# Altium PCB Solar Power Stage-V1.00.PcbDoc
Units mil, origin at the board's own origin, x right, y up, seen from the top; angles counter-clockwise.
Board outline 6000 x 4000 mil, 2 copper layers (Top Layer, Bottom Layer), stack 61.756 mil thick; 163 components, 96 nets, 371 pads, 0 vias.
Unrouted connection lines stored in the file: 245.
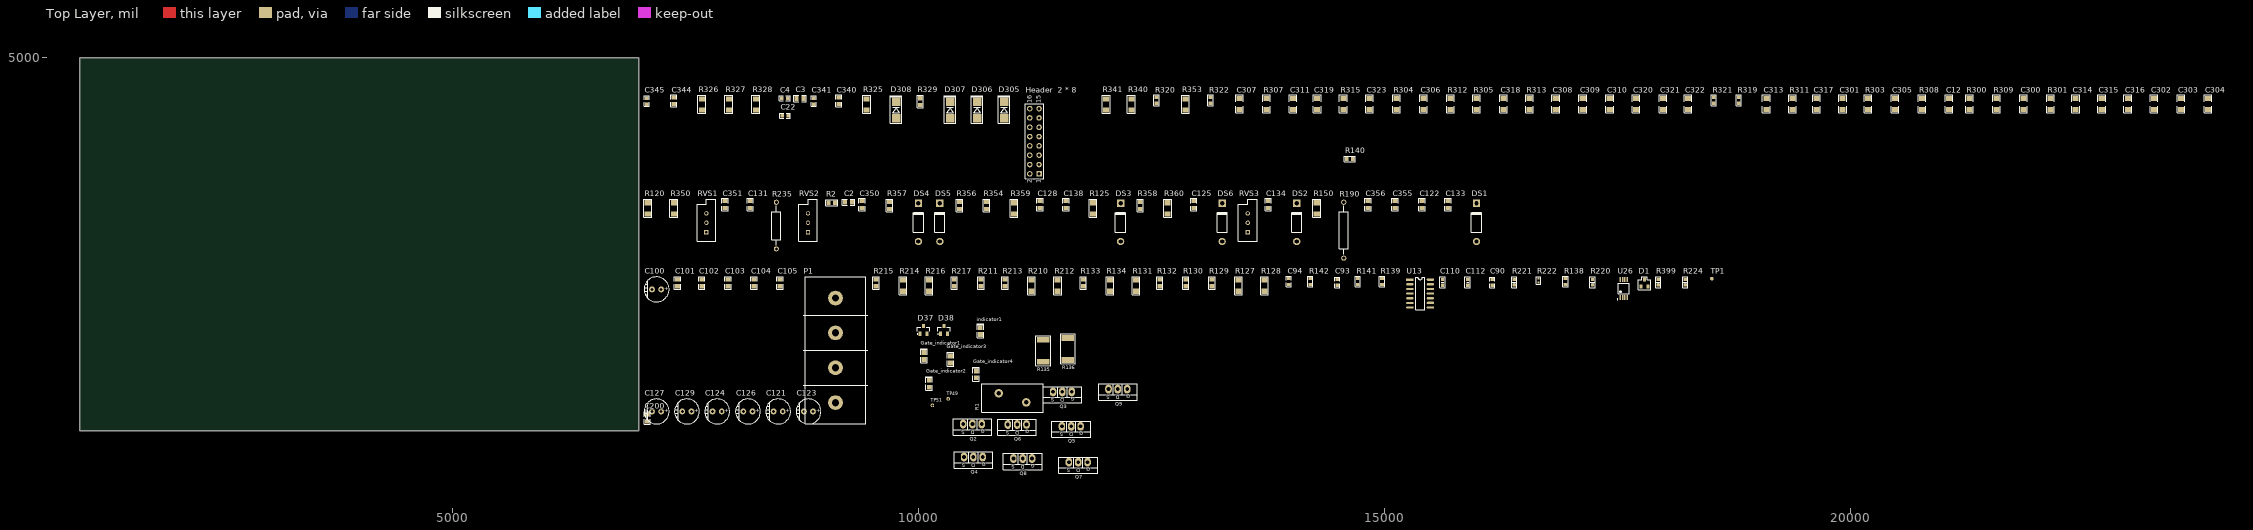
[diagram p0: Top Layer view]
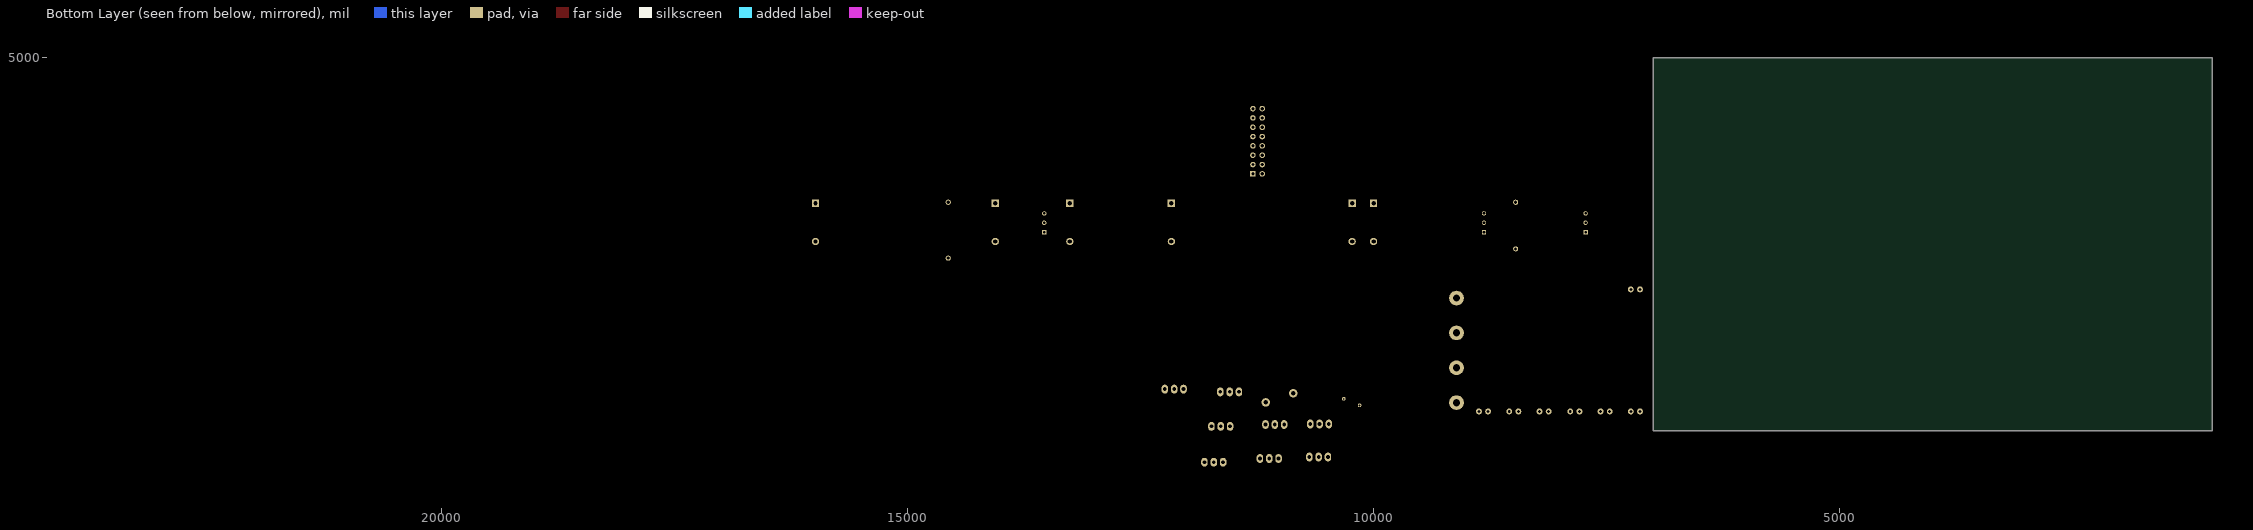
[diagram p1: Bottom Layer view, seen from below]

## Layer stack, top to bottom
Top Solder: solder mask 1, SM-001, Dk 4
Top Layer: signal copper 1.378
Dielectric 1: core 59, Core-043, Dk 4.3
Bottom Layer: signal copper 1.378
Bottom Solder: solder mask 1, SM-001, Dk 4

## Board outline
1000,1000 7000,1000 7000,5000 1000,5000

## Design rules (kind name [scope] priority, off if disabled: settings)
Clearance [All] p1: gap=10 ignorepadtopadclearanceinfootprint=FALSE except(0: Arc-Hole Track-Hole SMDPad-Hole THPad-Hole Via-Hole Fill-Hole Poly-Hole Region-Hole Text-Hole)
PolygonConnect [All] p1: connectstyle=Relief reliefconductorwidth=10 reliefentries=4 polygonreliefangle="90 Angle" airgapwidth=10
RoutingVias [All] p1: holewidth=28 width=50 viastyle="Through Hole" minholewidth=28 minwidth=50 maxholewidth=28 maxwidth=50
SolderMaskExpansion [All] p1: expansion=4 istentingtop=FALSE
Width [All] p1: maxlimit=10 minlimit=10 preferedwidth=10
30 further rules are at their usual default settings.

## Classes and differential pairs
component class MainBoard_Motor3: C3 C4 C12 C300 C301 C302 C303 C304 C305 C306 C307 C308 C309 C310 C311 C313 C314 C315 C316 C317 C318 C319 C320 C321 C322 C323 C325 C326 C327 C328 C329 C330 C331 C340 C341 C342 C344 C345 D305 D306 D307 D308 Gate_indicator1 Gate_indicator2 Gate_indicator3 Gate_indicator4 HCPL1 HCPL2 HCPL3 HCPL4 "Header  2 * 8" R300 R301 R303 R304 R305 R307 R308 R309 R311 R312 R313 R315 R319 R320 R321 R322 R325 R326 R327 R328 R329 R340 R341 R353 Z300 Z301 Z303 Z304
component class MainBoard_Motor2: C1 C2 C121 C122 C123 C124 C125 C126 C127 C128 C129 C131 C133 C134 C138 C200 C350 C351 C355 C356 Cf130 Cf132 DS1 DS2 DS3 DS4 DS5 DS6 indicator1 mosfet1 R2 R120 R125 R150 R190 R235 R350 R354 R356 R357 R358 R359 R360 Reg1_12v Reg2_12v Reg3_12v RVS1 RVS2 RVS3 T1 U1 Z1
component class MainBoard_Motor1: C22 C90 C93 C94 C100 C101 C102 C103 C104 C105 C110 C112 D1 D37 D38 P1 Q2 Q3 Q4 Q5 Q6 Q7 Q8 Q9 R1 R127 R128 R129 R130 R131 R132 R133 R134 R135 R136 R138 R139 R140 R141 R142 R210 R211 R212 R213 R214 R215 R216 R217 R220 R221 R222 R224 R399 TP1 TP49 TP51 U13 U26

## Components (designator, comment, footprint, x,y, rotation, side; value= is the part's Value field where it differs from the comment)
C2 "2.2nF" C0805 9250,3450 r0 top
C3 "4.7uF" C0805 8730,4565 r0 top
C4 "100nF" C0603 8565,4565 r0 top
C12 "0.1uF" 1206 21060,4505 r90 top
C22 "100nF" C0603 8570,4380 r0 top
C90 "10pF" C0603 16160,2590 r90 top
C93 "470pF" C0603 14495,2590 r90 top
C94 "10pF" C0603 13975,2600 r90 top
C100 "47uF 50V" RB-SGF-6.3MM 7190,2515 r0 top
C101 "100nF" C0805 7415,2585 r90 top
C102 "100nF" C0805 7675,2585 r90 top
C103 "100nF" C0805 7955,2585 r90 top
C104 "1uF" C0805 8235,2585 r90 top
C105 "1uF" C0805 8515,2585 r90 top
C110 "10nF" 0603-C-PW 15625,2590 r90 top value="MKP63 472M 300~Y2-4.7nF"
C112 "1000pF" 0603-C-PW 15895,2590 r90 top value="MKP63 472M 300~Y2-4.7nF"
C121 "100uF 25V" CAP_E_6.3x9_2.5 8495,1205 r0 top
C122 "100nF" C0805 15405,3425 r90 top
C123 "100uF 25V" CAP_E_6.3x9_2.5 8820,1205 r0 top
C124 "100uF 25V" CAP_E_6.3x9_2.5 7840,1205 r0 top
C125 "100nF" C0805 12955,3425 r90 top
C126 "100uF 25V" CAP_E_6.3x9_2.5 8170,1205 r0 top
C127 "100uF 25V" CAP_E_6.3x9_2.5 7190,1205 r0 top
C128 "100nF" C0805 11305,3425 r90 top
C129 "100uF 25V" CAP_E_6.3x9_2.5 7515,1205 r0 top
C131 "100nF" C0805 8195,3425 r90 top
C133 "100nF" C0805 15685,3425 r90 top
C134 "100nF" C0805 13755,3425 r90 top
C138 "100nF" C0805 11585,3425 r90 top
C200 "100pF" C0805 7090,1135 r90 top
C300 "0.1uF" 1206 21860,4505 r90 top
C301 "330pF" 1206 19920,4505 r90 top
C302 "0.1uF" 1206 23260,4505 r90 top
C303 "0.1uF" 1206 23550,4505 r90 top
C304 "100pF" 1206 23840,4505 r90 top
C305 "0.1uF" 1206 20480,4505 r90 top
C306 "0.1uF" 1206 15420,4505 r90 top
C307 "330pF" 1206 13445,4505 r90 top
C308 "0.1uF" 1206 16840,4505 r90 top
C309 "0.1uF" 1206 17130,4505 r90 top
C310 "100pF" 1206 17420,4505 r90 top
C311 "0.1uF" 1206 14020,4505 r90 top
C313 "330pF" 1206 19100,4505 r90 top
C314 "0.1uF" 1206 22420,4505 r90 top
C315 "0.1uF" 1206 22700,4505 r90 top
C316 "100pF" 1206 22980,4505 r90 top
C317 "0.1uF" 1206 19640,4505 r90 top
C318 "0.1uF" 1206 16280,4505 r90 top
C319 "330pF" 1206 14280,4505 r90 top
C320 "0.1uF" 1206 17700,4505 r90 top
C321 "0.1uF" 1206 17990,4505 r90 top
C322 "100pF" 1206 18260,4505 r90 top
C323 "0.1uF" 1206 14840,4505 r90 top
C340 "4.7uF" C0805 9145,4540 r90 top
C341 "100nF" C0603 8875,4535 r90 top
C344 "4.7uF" C0805 7375,4540 r90 top
C345 "100nF" C0603 7085,4535 r90 top
C350 "10nF" C0805 9395,3425 r90 top
C351 "470pF" C0805 7925,3425 r90 top
C355 "470nF" C0805 15115,3425 r90 top
C356 "10nF" C0805 14825,3425 r90 top
D1 "BAV99" SOT-23-PW 17755,2545 r0 top
D37 "BAV99" SOT-23 10055,2080 r0 top
D38 "BAV99" SOT-23 10275,2080 r0 top
D305 "5.1V" DO-214AC-PW 10920,4440 r90 top
D306 "5.1V" DO-214AC-PW 10630,4440 r90 top
D307 "5.1V" DO-214AC-PW 10340,4440 r90 top
D308 "5.1V" DO-214AC-PW 9760,4440 r90 top
DS1 "BYV27-100." DO-41 15990,3235 r90 top
DS2 "BYV27-100" DO-41 14060,3235 r90 top
DS3 "BYV27-100" DO-41 12170,3235 r90 top
DS4 "BYV27-100" DO-41 10000,3235 r90 top
DS5 "BYV27-100" DO-41 10230,3235 r90 top
DS6 "BYV27-100" DO-41 13260,3235 r90 top
Gate_indicator1 "GREEN" LED_0805_GREEN 10060,1800 r90 top
Gate_indicator2 "GREEN" LED_0805_GREEN 10115,1502 r90 top
Gate_indicator3 "GREEN" LED_0805_GREEN 10345,1762 r90 top
Gate_indicator4 "GREEN" LED_0805_GREEN 10620,1602 r90 top
"Header  2 * 8" "FROM DSP_ HEADER7X" HDR2X8 11295,3755 r90 top
indicator1 "GREEN" LED_0805_GREEN 10665,2067 r90 top
P1 "TERMINAL4_9.5mm" "Terminal 9.5mm_4" 9110,1300 r90 top
Q2 "IRF3205" TO-220 10580,1070 r180 top
Q3 "IRF3205" TO-220 11545,1415 r180 top
Q4 "IRF3205" TO-220 10589.85,715.82 r180 top
Q5 "IRF3205" TO-220 11640,1045 r180 top
Q6 "IRF3205" TO-220 11060,1065 r180 top
Q7 "IRF3205" TO-220 11715,660 r180 top
Q8 "IRF3205" TO-220 11120,700 r180 top
Q9 "IRF3205" TO-220 12140,1445 r180 top
R1 "VARISTOR" VARISTOR 11009.69,1351.06 r90 top
R2 "2.2k" R0805 9070,3445 r0 top
R120 "1R" R1206 7095,3385 r90 top
R125 "20R" R1206 11875,3385 r90 top
R127 "20R" R1206 13435,2555 r90 top
R128 "20R" R1206 13715,2555 r90 top
R129 "4.7K" R0805 13150,2585 r90 top
R130 "4.7K" R0805 12870,2585 r90 top
R131 "20R" R1206 12335,2555 r90 top
R132 "4.7K" R0805 12590,2585 r90 top
R133 "4.7K" R0805 11770,2585 r90 top
R134 "20R" R1206 12055,2555 r90 top
R135 "0.05" 2512 11339.13,1856.81 r90 top
R136 "0.05" 2512 11604.13,1876.81 r90 top
R138 "86.6K" R0603 16945,2600 r90 top
R139 "3K" R0603 14975,2600 r90 top
R140 "1K" R0603 14630,3915 r0 top
R141 "3K" R0603 14715,2600 r90 top
R142 "86.6K" R0603 14205,2600 r90 top
R150 "10k" R1206 14275,3385 r90 top
R190 "25k" AXIAL-0.6 14565,3150 r90 top
R210 "20R" R1206 11215,2555 r90 top
R211 "4.7K" R0805 10670,2585 r90 top
R212 "20R" R1206 11495,2555 r90 top
R213 "4.7K" R0805 10930,2585 r90 top
R214 "20R" R1206 9835,2555 r90 top
R215 "4.7K" R0805 9545,2585 r90 top
R216 "20R" R1206 10115,2555 r90 top
R217 "4.7K" R0805 10385,2585 r90 top
R220 "10k" 0603-R-PW 17235,2590 r90 top
R221 "10K" 0603-R-PW 16395,2590 r90 top
R222 "10K" 0402-R-PW 16655,2590 r90 top
R224 "390K" 0603-R-PW 18230,2590 r90 top
R235 "680" AXIAL-0.5 8475,3200 r90 top
R300 "3.3K" 1206 21280,4505 r90 top
R301 "100" 1206 22150,4505 r90 top
R303 "47k" 1206 20190,4505 r90 top
R304 "3.3K" 1206 15130,4505 r90 top
R305 "100" 1206 15990,4505 r90 top
R307 "47k" 1206 13735,4505 r90 top
R308 "3.3K" 1206 20770,4505 r90 top
R309 "100" 1206 21570,4505 r90 top
R311 "47k" 1206 19380,4505 r90 top
R312 "3.3K" 1206 15710,4505 r90 top
R313 "100" 1206 16560,4505 r90 top
R315 "47k" 1206 14560,4505 r90 top
R319 "5K" R0603 18805,4545 r90 top
R320 "5K" R0603 12555,4545 r90 top
R321 "5K" R0603 18535,4545 r90 top
R322 "5K" R0603 13135,4545 r90 top
R325 "470R" R1206 9445,4500 r90 top
R326 "470R" R1206 7675,4500 r90 top
R327 "470R" R1206 7965,4500 r90 top
R328 "470R" R1206 8255,4500 r90 top
R329 "50R" R0805 10020,4530 r90 top
R340 "50R" R1206 12285,4500 r90 top
R341 "50R" R1206 12015,4500 r90 top
R350 "1R" R1206 7375,3385 r90 top
R353 "50R" R1206 12865,4500 r90 top
R354 "22K" R0805 10730,3415 r90 top
R356 "3.3k" R0805 10440,3415 r90 top
R357 "1k" R0805 9690,3415 r90 top
R358 "0 ohm" R0805 12380,3415 r90 top
R359 "150k" R1206 11025,3385 r90 top
R360 "33k" R1206 12675,3385 r90 top
R399 "10K" 0603-R-PW 17940,2590 r90 top
RVS1 "50K" VR5 7725,3230 r90 top
RVS2 "10K" VR5 8815,3230 r90 top
RVS3 "120K" VR5 13535,3230 r90 top
TP1 "TP" TP-SMD-1MM 18515,2630 r90 top
TP49 "TP" TP_1mm 10320,1340 r90 top
TP51 "TP" TP_1mm 10150,1270 r90 top
U13 "LMV324DTBR2G" SO-14 15385,2470 r0 top
U26 "LM2903DGKR" TSSOP_8-PW 17570,2525 r90 top

## Footprints (in the part's own frame and the unit in brackets; to place one, negate y for a bottom-side part, rotate by r counter-clockwise, add the part's x,y. Pads: shape width x height; smd on the part's side, far side on the other; paste and mask are expansions set on the pad)
0402-R-PW [mil] "C0402"
  rect 20x24 smd: 1(0,0) 2(40,0)
  silkscreen extent -19,-22 59,22
0603-C-PW [mm]
  rect 0.9x0.9 smd: 1(-0.78,0) 2(0.78,0)
  silkscreen extent -1.53,-0.75 1.53,0.75, body extent -0.75,-0.41 0.85,0.4, height 0.9
0603-R-PW [mm]
  rect 0.8x0.9 smd: 1(-0.749,0) 2(0.749,0)
  silkscreen extent -1.48,-0.72 1.48,0.72, body extent -0.75,-0.41 0.85,0.4, height 0.37
1206 [mm] "1206"
  rect 1.4x1.65 smd: 1(-1.524,0) 2(1.524,0)
  Top Layer pour cut-out: 0.635,1.016 0.635,-1.143 -0.635,-1.144 -0.635,1.016
  silkscreen extent -2.45,-1.05 2.45,1.05, body extent -1.55,-0.78 1.55,0.78, height 0.47
2512 [mm] "Molded Resistor, 2-Leads, Body 6.4x3.2mm, IPC Medium Density"
  rect 1.6x3.4 smd mask+0.15: 1(-3,0) 2(3,0)
  silkscreen extent -4.1,-2 4.1,2, body extent -3.3,-1.7 3.3,1.7, height 0.7
AXIAL-0.5 [mm] "Axial Device, Thru-Hole; 2 Leads; 0.5 in Pin Spacing"
  round 1.4 hole 0.85: 1(-6.35,0) 2(6.35,0)
  silkscreen extent -5.33,-1.27 5.33,1.27
AXIAL-0.6 [mm] "Axial Device, Thru-Hole; 2 Leads; 0.6 in Pin Spacing"
  round 1.4 hole 0.85: 1(-7.62,0) 2(7.62,0)
  silkscreen extent -6.6,-1.27 6.6,1.27
C0603 [mm] "0603"
  rect 0.9x1 smd: 1(-0.8,0) 2(0.8,0)
  silkscreen extent -1.45,-0.7 1.45,0.7, body extent -0.8,-0.4 0.8,0.4, height 0.3
C0805 [mm] "0805"
  rect 1.1x1.32 smd: 1(-0.925,0) 2(0.925,0)
  silkscreen extent -1.68,-0.86 1.68,0.86, body extent -1,-0.62 1,0.63, height 0.78
CAP_E_6.3x9_2.5 [mm]
  round 1.6 hole 0.8: 1(1.25,0) 2(-1.25,0)
  silkscreen extent -3.4,-3.4 3.4,3.4, body extent -3.16,-3.15 3.15,3.15, height 9.01
DO-41 [mm] "Diode, Axial; Body 5.2 x 2.7 mm (LxDia. max), Lead Dia. 0.86 mm (max)"
  round 2 hole 1.2: 1(-5.23,0)
  rect 2x2 hole 1.2: 2(5.23,0)
  silkscreen extent -2.65,-1.4 2.75,1.4
DO-214AC-PW [mm]
  rect 2.3x2.3 smd: 1(-2.2,0) 2(2.2,0)
  silkscreen extent -3.65,-1.55 3.95,1.55, body extent -2.6,-1.3 2.6,1.3, height 2.4
HDR2X8 [mm] "Connector; Header; 8x2 Position"
  rect 1.5x1.5 hole 0.9: 1(0,0)
  round 1.5 hole 0.9: 2(0,2.54) 3(2.54,0) 4(2.54,2.54) 5(5.08,0) 6(5.08,2.54) 7(7.62,0) 8(7.62,2.54) 9(10.16,0) 10(10.16,2.54) 11(12.7,0) 12(12.7,2.54) 13(15.24,0) 14(15.24,2.54) 15(17.78,0) 16(17.78,2.54)
  silkscreen extent -1.27,-1.27 19.05,3.81
LED_0805_GREEN [mil] "Surface mount LED 0805"
  rect 50x51.18 smd: 1(-37,0)
  rect 50x50 smd: 2(37,0)
  silkscreen extent -71,-35 77,35, body extent -40,-25 40,25, height 43
R0603 [mm] "0603"
  rect 0.9x1 smd: 1(-0.8,0) 2(0.8,0)
  silkscreen extent -1.45,-0.7 1.45,0.7, body extent -0.8,-0.4 0.8,0.4, height 0.37
R0805 [mm] "0805"
  rect 1.1x1.32 smd: 1(-0.925,0) 2(0.925,0)
  silkscreen extent -1.68,-0.86 1.68,0.86, body extent -1,-0.63 1,0.63, height 0.47
R1206 [mm] "1206"
  rect 1.4x1.65 smd: 1(-1.524,0) 2(1.524,0)
  Top Layer pour cut-out: 0.635,1.016 0.635,-1.143 -0.635,-1.144 -0.635,1.016
  silkscreen extent -2.45,-1.05 2.45,1.05, body extent -1.55,-0.78 1.55,0.78, height 0.47
RB-SGF-6.3MM [mm]
  round 1.6 hole 0.8: 1(1.25,0) 2(-1.25,0)
  silkscreen extent -3.4,-3.4 3.4,3.4
SO-14 [mil] "SOIC-14"
  rect 80x25 smd: 1(-110,150)
  oval 80x25 smd: 2(-110,100) 3(-110,50) 4(-110,0) 7(-110,-150) 8(110,-150) 9(110,-100) 12(110,50) 13(110,100) 14(110,150)
  oval 80x24 smd: 5(-110,-50) 6(-110,-100) 10(110,-50) 11(110,0)
  silkscreen extent -50,-175 50,175, body extent -122,-172 122,172, height 69
SOT-23 [mil] "SOT-23"
  rect 32x50 smd: 1(-37.4,-42.5) 2(37.4,-42.5)
  rect 32x45 smd: 3(0,42.5)
  silkscreen extent -69,-45 66,29, body extent -59,-45 59,43, height 47
SOT-23-PW [mil] "SOT-23"
  rect 36x45 smd: 1(0,0) 2(74.8,0) 3(37.4,74.8)
  silkscreen extent -29,-31 104,106, body extent -22,-3 96,86, height 47
"Terminal 9.5mm_4" [mm]
  round 4 hole 2: 1(0,0) 2(9.5,0) 3(19,0) 4(28.5,0)
  silkscreen extent -5.8,-8.8 34.3,8.8
TO-220 [mil]
  oval 70x94.49 hole 40: 1(-100,0) 2(0,0) 3(100,0)
  silkscreen extent -207,-55 207,118
TP-SMD-1MM [mm]
  round 1 smd: 1(0,0)
TP_1mm [mm]
  round 1 hole 0.5: 1(0,0)
TSSOP_8-PW [mm] "TSSOP, 8-Leads, Body 3.0x4.4mm (max), Pitch 0.65mm, IPC Medium Density"
  rect 1.4x0.4 smd mask+0.15: 1(-2.45,0.975) 2(-2.45,0.325) 3(-2.45,-0.325) 4(-2.45,-0.975) 5(2.45,-0.975) 6(2.45,-0.325) 7(2.45,0.325) 8(2.45,0.975)
  silkscreen extent -3.02,-1.52 1.4,1.82, body extent -3.2,-1.5 3.2,1.5, height 1.2
VARISTOR [mm]
  round 2.3 hole 1.2: 1(1.25,3.75) 2(-1.25,-3.75)
  silkscreen extent -3.9,-8.4 3.9,8.4
VR5 [mm] "Thru-Hole; 3 Leads"
  rect 1.2x1.2 hole 0.7: 1(-2.54,0)
  round 1.2 hole 0.7: 2(0,0) 3(2.54,0)
  silkscreen extent -5.08,-2.54 6.35,2.54

## Part data
C2: library part Cap_10nF_50V_0805, "Cap_2.2nF_10%_X7R_50V_0805", Manufacturer=Yageo, MFR PART NO=CC0805KRX7R9BB103, SAP=10020252
C3 C340 C344: library part Cap_4.7uF_50V_0805, "Cap_4.7uF_10%_X5R_50V_0805", Manufacturer=TDK, MFR PART NO=C2012X5R1H475K125AB, SAP=10021599
C4 C341 C345: library part Cap_100nF_50V_0603, "Cap_100nF_10%_X7R_50V_0603", Manufacturer=Yageo, MFR PART NO=CC0603KPX7R9BB104, SAP=10021427
C12 C300 C301 C302 C303 C304 C305 C306 C307 C308 C309 C310 C311 C313 C314 C315 C316 C317 C318 C319 C320 C321 C322 C323: library part CAP, "Capacitor"
C22: library part C0402, "Ceramic Chip Capacitor - Standard", Manufacturer=Yageo, MFR PART NO=CC0603KPX7R9BB104, PackageDocument=Mar-2001, Code_IPC="1005 [0402]", Code_JEITA=0402, ComponentLink1Description="Manufacturer Link", ComponentLink1URL=http://www.kemet.com/, ComponentLink2Description=Datasheet, ComponentLink2URL=http://www.kemet.com/kemet/web/homepage/kechome.nsf/vapubfilesname/F3102TA.pdf/$file/F3102TA.pdf, DatasheetDocument=Mar-2001, LatestRevisionDate=19-Mar-2004, LatestRevisionNote="Silkscreen size reduced.", Note="Footprint corresponds to dimensions for bulk cassette packaging. This case size has tightened tolerances.", PackageReference=0402, Published=17-Jul-2002, Publisher="Altium Limited"
C90 C94: library part Cap_510pF_50V_0603, "Cap_10pF_5%_C0G_50V_0603", Manufacturer=Yageo, MFR PART NO=CC0603JRNPO9BN510, ComponentLink1Description="Manufacturer Link", ComponentLink1URL=http://www.kemet.com/, ComponentLink2Description=Datasheet, ComponentLink2URL=http://www.kemet.com/kemet/web/homepage/kechome.nsf/vapubfilesname/F3102TA.pdf/$file/F3102TA.pdf, SAP=10021841
C93: library part Cap_470pF_50V_0603, "Cap_470pF_5%_C0G_50V_0603", Manufacturer=Yageo, MFR PART NO=CC0603JRNPO9BN471
C100: library part "Cap_47uF 50V_EL_6.3mm", "Cap_47uF 50V_Pitch2.5mm", Manufacturer=AIHUA, MFR PART NO=ERS1HM470E11OT, SAP=10023070
C101 C102 C103: library part Cap_100nF_50V_0805, "Cap_100nF_5%_X7R_50V_0805", Manufacturer=VISHAY, MFR PART NO=VJ0805Y104JXAAT, SAP=10010690
C104 C105: library part Cap_1uF_50V_0805, "Cap_1uF_20%_X5R_50V_0805", Manufacturer="Taiyo Yuden", MFR PART NO=UMK212BJ105MGHT, SAP=10021804
C110: library part Cap, "CAP CER 10000PF 50V X7R 0603", Manufacturer=Yageo, MFR PART NO=AC0603KPX7R9BB103, LatestRevisionDate=17-Jul-2002, LatestRevisionNote="Re-released for DXP Platform.", PackageDescription="Radial Cap, Thru-Hole; 2 Leads; 0.3 in Pin Spacing", PackageReference=RAD-0.3, Published=8-Jun-2000, Publisher="Altium Limited"
C112: library part Cap, "CAP CER 1000PF 50V X7R 0603", Manufacturer=Yageo, MFR PART NO=CC0603KRX7R9BB102, LatestRevisionDate=17-Jul-2002, LatestRevisionNote="Re-released for DXP Platform.", PackageDescription="Radial Cap, Thru-Hole; 2 Leads; 0.3 in Pin Spacing", PackageReference=RAD-0.3, Published=8-Jun-2000, Publisher="Altium Limited"
C121 C123 C124 C126 C127 C129: library part "Cap_100uF 25V_EL_6.3MM", "Cap_100uF 25V_Pitch2.5mm", Manufacturer=AIHUA, MFR PART NO=ERS1EM101E11OT
C122 C125 C128 C131 C133 C134 C138 C350 C351 C355 C356: library part Cap_10nF_50V_0805, "Cap_10nF_10%_X7R_50V_0805", Manufacturer=Yageo, MFR PART NO=CC0805KRX7R9BB103, SAP=10020252
C200: library part Cap_100pF_50V_0805, "Cap_100pF_10%_X7R_50V_0805", Manufacturer=Yageo, MFR PART NO=CC0805KRX7R9BB101, SAP=10020251
D1: "DIODE ARRAY GP 100V 215MA SOT23", Manufacturer=Nexperia, MFR PART NO=BAV99,215
D37 D38: "Dِiode_BAV99_A7W_SOT23", Manufacturer="Diode Incorporated", MFR PART NO=BAV99-7-F, Supplier Part Number 1=8_hDx09NysxyY_EZJdaSbs5L1p9U5ut-2MaZMQWGOaA, ComponentLink1Description="Manufacturer URL", ComponentLink1URL=http://www.infineon.com/, ComponentLink2Description=Datasheet, ComponentLink2URL=http://www.infineon.com/dgdl/bav99series.pdf?folderId=db3a30431400ef6801141b5844e103ea&fileId=db3a30431400ef6801141c1b237d042f, ComponentLink3Description="Package Specification", ComponentLink3URL=http://www.infineon.com/dgdl/smbta14_mmbta14.pdf?folderId=db3a30431441fb5d011445c30f210183&fileId=db3a30431441fb5d011445ef0201018c, Green=TRUE, Mounting Technology="Surface Mount", PackageDescription="3-Pin Small Outline Transistor Package, 1.3 x 2.9 mm Body, 0.95 mm Pitch", PackageReference=SOT23, PackageVersion=Apr-08, Packing=Reel, Supplier 1=Arrow, Supplier 2=Farnell, Supplier 3=Farnell, Supplier Part Number 2=1056504RL, Supplier Part Number 3=1056504
D305 D306 D307 D308: library part "D Zener", "DIODE ZENER 5V 1.25W DO214AC", Manufacturer="ON Semiconductor", MFR PART NO=BZG05C3V3, LatestRevisionDate=17-Jul-2002, LatestRevisionNote="Re-released for DXP Platform.", PackageDescription="Diode, Thru-Hole; 2 Leads; 0.7 in Pin Spacing", PackageReference=DIODE-0.7, Published=8-Jun-2000, Publisher="Altium Limited"
DS1 DS2 DS3 DS4 DS5 DS6: library part "Diode 1N4007", "1 Amp General Purpose Rectifier", PackageDocument=Aug-1999, Code_JEDEC=DO-204-AL, ComponentLink1Description="Manufacturer Link", ComponentLink1URL=http://www.fairchildsemi.com/, ComponentLink2Description=Datasheet, ComponentLink2URL=http://www.fairchildsemi.com/ds/1N%2F1N4001.pdf, DatasheetDocument=1998, LatestRevisionDate=17-Jul-2002, LatestRevisionNote="Re-released for DXP Platform.", PackageReference=DO-41, Published=8-Jun-2000, Publisher="Altium Limited"
Gate_indicator1 Gate_indicator2 Gate_indicator3 Gate_indicator4 indicator1: library part LED3, "Typical BLUE SiC LED", Manufacturer=Kingbright, MFR PART NO=APT2012SGC, DatasheetVersion=16-Apr-2002, LatestRevisionDate=17-Dec-2003, LatestRevisionNote="PCB Footprint replaced.", PackageDescription="SM LED; 2 C-Bend Leads; Body 3.5 x 2.8 x 1.9 mm, inc leads (LxWxH typ)", PackageReference=3.5X2.8X1.9, PackageVersion=16-Apr-2002, Published=8-Jun-2000, Publisher="Altium Limited"
"Header  2 * 8": library part "Header 8X2", "Header, 8-Pin, Dual row", LatestRevisionDate=17-Jul-2002, LatestRevisionNote="Re-released for DXP Platform.", Publisher="Altium Limited"
P1: "T44-9.5mm_4", Manufacturer="Cixi Kefa Elec", MFR PART NO=KF45C-9-5-4P
Q2 Q3 Q4 Q5 Q6 Q7 Q8 Q9: library part MOS_IRF3205, "MOSFET N-CHANNEL_ 55V_ TO-220", Manufacturer="International Rectifier", MFR PART NO=IRF3205
R1: "35V 2cm", Manufacturer="TDK Epcos", MFR PART NO=B72220S0350K101
R2 R356 R357 R358: library part Res_4.7K_0805, "Res_2.2K_1%_0805", Manufacturer=Yageo, MFR PART NO=RC0805FR-074K7L, SAP=10021870
R120 R350: library part Res_2.2R_1206, "Res_2.2R_1%_1206", Manufacturer=Yageo, MFR PART NO=RC1206FR-072R2L, SAP=10021874
R125 R127 R128 R131 R134 R150 R210 R212 R214 R216 R325 R326 R327 R328 R340 R341 R353 R359 R360: library part Res_20R_1206, "Res_20R_1%_0.25W_1206", Manufacturer=Yageo, MFR PART NO=RC1206FR-0720RL, SAP=10021877
R129 R130 R132 R133 R211 R213 R215 R217 R329 R354: library part Res_4.7K_0805, "Res_4.7K_1%_0805", Manufacturer=Yageo, MFR PART NO=RC0805FR-074K7L, SAP=10021870
R135 R136: library part Res_0.05_2512, "Res_0.05_1%_2512", Manufacturer="Bourns Inc.", MFR PART NO=CRA2512-FZ-R050ELF
R138 R142: library part Res_86.6K_0603, "Res_86.6K_1%_0603", Manufacturer=Yageo, MFR PART NO=AC0603FR-0786K6L
R139 R141: library part Res_3K_0603, "Res_3K_1%_0603", Manufacturer=Yageo, MFR PART NO=RC0603FR-073KL, SAP=10016031
R140: library part ERAV, "RES SMD 1K OHM 1% 1/10W 0603", Manufacturer=Yageo, MFR PART NO=RC0603FR-071KL, PackageDocument=Mar-2003, Code_IPC="1608 [0603]", ComponentLink1Description="Manufacturer Link", ComponentLink1URL=http://www.panasonic.com/industrial/components/resistive_products.htm, ComponentLink2Description=Datasheet, ComponentLink2URL=http://www.panasonic.com/industrial/components/pdf/AOF0000CE1.pdf, LatestRevisionDate=19-Mar-2004, LatestRevisionNote="Silkscreen size reduced.", Note="If flow soldering, adjust pad width of PCB Footprint to 0.7 - 0.8 times the width of the resistor.", PackageReference=ERA-0603, Published=17-Dec-2003, Publisher="Altium Limited"
R190 R235: library part Res2, "Resistor", LatestRevisionDate=17-Jul-2002, LatestRevisionNote="Re-released for DXP Platform.", PackageReference=AXIAL-0.4, Published=8-Jun-2000, Publisher="Altium Limited"
R220: library part RES1, "RES SMD 47K OHM 1% 1/10W 0603", Manufacturer=Yageo, MFR PART NO=RC0603FR-0747KL
R221: library part RES1, "RES SMD 3.9K OHM 1% 1/10W 0603", Manufacturer=Yageo, MFR PART NO=RC0603FR-073K9L
R222: library part RES1, "RES SMD 11K OHM 1% 1/16W 0402", Manufacturer=Yageo, MFR PART NO=RC0402FR-0711KL
R224: library part RES1, "Res Thick Film 0603 390K Ohm 1% 0.1W", Manufacturer=Yageo, MFR PART NO=AC0603FR-07390KL
R300 R301 R303 R304 R305 R307 R308 R309 R311 R312 R313 R315: library part RES1
R319 R320 R321 R322: library part Res_3.3K_0603, "Res_3.3K_1%_0603", Manufacturer=Yageo, MFR PART NO=RC0603FR-073K3L, SAP=10016022
R399: library part RES1, "RES, THICK FILM, 4K7, 1%, 0.1W, 0603", Manufacturer=Yageo, MFR PART NO=RC0603FR-134K7L
RVS1 RVS2 RVS3: library part "RESISTOR VAR", Text Field1=40, Text Field2=20
TP1: library part "Header 1", "Header, 1-Pin", LatestRevisionDate=17-Jul-2002, LatestRevisionNote="Re-released for DXP Platform.", Publisher="Altium Limited"
TP49 TP51: library part TEST-POINT, "TEST-POINT", LatestRevisionDate=17-Jul-2002, LatestRevisionNote="Re-released for DXP Platform.", Publisher="Altium Limited"
U13: "IC_OpAmp_Quad_TSSOP-14", Manufacturer="On Semiconductor", Supplier Part Number 1=LMV324DTBR2G-ND, ComponentLink1Description="Manufacturer URL", ComponentLink1URL=http://www.onsemi.com/, ComponentLink2Description=Datasheet, ComponentLink2URL=http://www.onsemi.cn/pub_link/Collateral/LMV321-LMV358-LMV324-D.PDF, ComponentLink3Description="Package Specification", ComponentLink3URL=http://www.onsemi.com/pub_link/Collateral/948G-01.PDF, DatasheetVersion="Rev. 10", GBW Typ (MHz)=1, MFR PART NO=LMV324DTBR2G, Mounting Technology="Surface Mount", PackageDescription="14-Pin Small Outline Package, Body 5 x 4.4 mm, Pitch 0.65 mm", PackageReference=TSSOP-14-948G-01, PackageVersion="Rev. B, 10/2006", Packing="Tape and Reel", PartNumber=LMV324DTBR2G, RoHS=TRUE, SR Typ (V/uS)=1, Supplier 1=Digi-Key, Supplier 2=Newark, Supplier 3=Mouser, Supplier Part Number 2=01P4987, Supplier Part Number 3=863-LMV324DTBR2G, VCC Max (V)=5.5, VCC Min (V)=2.7
U26: "IC DUAL DIFF COMPARATOR 8VSSOP", Manufacturer="Texas Instruments", Code_JEDEC=MO-001-AN, ComponentLink1Description="Manufacturer Link", ComponentLink1URL=http://www.st.com/, ComponentLink2Description=Datasheet, ComponentLink2URL=http://www.st.com/stonline/products/literature/ds/2163/lm358.pdf, DatasheetVersion=Jun-1998, LatestRevisionDate=06-Jun-2005, LatestRevisionNote="Stylized 3D Model Added.", MFR PART NO=LM2903DGKR, PackageDescription="DIP; 8 Leads; Row Spacing 7.62 mm; Pitch 2.54 mm", PackageReference=DIP8, Published=24-Aug-2001, Publisher="Altium Limited"

## Nets (pads, with @x,y where several pads share a name; then routed paths per layer and width w, separated by ;. In a path a pad name is that pad's centre, name@x,y a point inside that pad or via, vN(x,y) a via of type N, cw(c..) or ccw(c..) an arc to the next point about the centre after c; other vN are vias at no path point)
3V3: "Header  2 * 8.15" D1.2 D37.2 D38.2 R399.2
+5V: "Header  2 * 8.13" C12.1 C22.2 C300.1 C306.1 C318.1 R300.2 R304.2 R308.2 R312.2 U13.4 U26.8
+V_Motor_1: P1.1 R1.2 R135.2 R136.2 R141.1
+V_Shant_in: C302.1 C303.1 C304.1 Q2.3 Q3.3 Q4.2 Q5.2 R130.1 R132.1 R135.1 R136.1 R139.1
-V_Motor_1: C308.1 C309.1 C310.1 P1.2 Q6.3 Q7.3 Q8.2 Q9.2 R1.1 R129.1 R133.2
COMMAND1: D305.2 R353.2
COMMAND2: D307.2 R341.2
COMMAND3: D308.2 R329.2
COMMAND4: D306.2 R340.2
DSP_C5_Mot1_Amp: "Header  2 * 8.9" C93.2 D38.3 R140.1 R220.2 TP51.1
EMITTER1: R328.2
EMITTER2: R325.2
EMITTER3: R327.2
EMITTER4: R326.2
fault: "Header  2 * 8.11" R224.2 U26.7
FAULT1: C301.1 R300.1
FAULT2: C313.1 R308.1
FAULT3: C307.1 R304.1
FAULT4: C319.1 R312.1
feedback: DS5.2 R360.2 RVS3.3
Gate_S1: R127.1 R131.1 TP49.1
Gate_S2: Gate_indicator3.1 R311.2
Gate_S3: Gate_indicator2.1 R307.2
Gate_S4: Gate_indicator4.1 R315.2
GND: "Header  2 * 8.2" "Header  2 * 8.4" "Header  2 * 8.6" "Header  2 * 8.8" "Header  2 * 8.10" "Header  2 * 8.12" "Header  2 * 8.14" "Header  2 * 8.16" C12.2 C22.1 C90.2 C93.1 C100.2 C101.1 C102.1 C103.1 C104.1 C105.1 C300.2 C301.2 C306.2 C307.2 C313.2 C314.1 C315.1 C316.1 C318.2 C319.2 C320.1 C321.1 C322.1 D1.1 D37.1 D38.1 D305.1 D306.1 D307.1 D308.1 P1.3 Q4.3 Q5.3 Q8.3 Q9.3 R138.2 R150.1 R211.1 R213.1 R215.2 R217.1 R358.1 U13.11 U26.4
GND1: C302.2 C305.2 C340.1 C341.1 R303.1 R319.1 R328.1
GND2: C134.1
GND3: C314.2 C317.2 C320.2 C323.2 C344.1 C345.1 R311.1 R315.1 R321.1 R322.1 R325.1 R326.1
Gndp: C2.1 C131.1 C350.1 C351.1 C355.1 R120.2 R235.1 R350.2 R354.1 R358.2 RVS1.3
NetC2_2: C2.2 RVS2.3
NetC90_1: C90.1 D37.3 R138.1 R139.2 U13.10
NetC94_1: C94.1 R140.2 R142.1 U13.8
NetC94_2: C94.2 R141.2 R142.2 U13.9
NetC110_1: C110.1 R221.1
NetC110_2: C110.2 D1.3 R220.1 R221.2 TP1.1 U26.6
NetC112_1: C112.1 R222.1
NetC112_2: C112.2 R222.2 R224.1 R399.1 U26.5
NetC121_1: C121.1 C122.2 DS1.2
NetC124_1: C124.1 C125.2 DS2.2
NetC127_1: C127.1 C128.2 DS3.2
NetC131_2: C131.2 DS4.2 DS5.1 R235.2
NetC200_1: C200.1 R2.2 R359.1 R360.1
NetC200_2: C200.2 R359.2
NetC304_2: C304.2 R301.1
NetC310_2: C310.2 R305.1
NetC316_2: C316.2 R309.1
NetC322_2: C322.2 R313.1
NetC325_2: 
NetC327_2: 
NetC329_2: 
NetC331_2: 
NetC350_2: C350.2 R356.2
NetC351_2: C351.2 R357.1
NetC356_1: C356.1 DS6.2 R190.1
NetD300_1: R301.2
NetD301_1: R305.2
NetD302_1: R309.2
NetD303_1: R313.2
NetDS6_1: DS6.1
NetGate_indicator1_2: Gate_indicator1.2 R319.2
NetGate_indicator2_2: Gate_indicator2.2 R320.2
NetGate_indicator3_2: Gate_indicator3.2 R321.2
NetGate_indicator4_2: Gate_indicator4.2 R322.2
Netindicator1_2: indicator1.2 R150.2
Netmosfet1_1: R125.2 R354.2
Netmosfet1_3: R120.1 R350.1 R357.2
NetQ2_1: Q2.1 R127.2 R130.2
NetQ3_1: Q3.1 R131.2 R132.2
NetQ4_1: Q4.1 R210.2 R211.2
NetQ5_1: Q5.1 R216.2 R217.2
NetQ6_1: Q6.1 R133.1 R134.1
NetQ7_1: Q7.1 R128.1 R129.2
NetQ8_1: Q8.1 R214.1 R215.1
NetQ9_1: Q9.1 R212.1 R213.2
NetR2_1: R2.1 RVS1.1 RVS1.2
NetR125_1: R125.1
NetR356_1: R356.1 RVS2.1 RVS2.2
out_trans_1A: DS1.1
out_trans_1B: C121.2 C122.1 C123.2
out_trans_2A: DS2.1
out_trans_2B: C124.2 C125.1 C126.2
out_trans_3A: DS3.1
out_trans_FeedA: DS4.1
PWM1_HCPL316j_input: "Header  2 * 8.1" R353.1
PWM2_HCPL316j_input: "Header  2 * 8.3" R341.1
PWM3_HCPL316j_input: "Header  2 * 8.5" R329.1
PWM4_HCPL316j_input: "Header  2 * 8.7" R340.1
V_gate_drive1_12V: C340.2 C341.2
V_gate_drive2_12V: C3.2 C4.2
V_gate_drive3_12V: C344.2 C345.2
V_gate_drive_12V: 
VCC+1(20v): C303.2 C305.1
VCC+2(20v): C315.2 C317.1
VCC+3(20v): C309.2 C311.1
VCC+4(20v): C321.2 C323.1
vdcpo: C100.1 C101.2 C102.2 C103.2 C104.2 C105.2 C133.2 C134.2 C138.2 C355.2 C356.2 indicator1.1 P1.4 Q2.2 Q3.2 Q6.2 Q7.2 R190.2 RVS3.1 RVS3.2
pads on no net: C3.1 C4.1 C123.1 C126.1 C127.2 C128.1 C129.1 C129.2 C133.1 C138.1 C308.2 C311.2 Gate_indicator1.1 R128.2 R134.2 R210.1 R212.2 R214.2 R216.1 R303.2 R307.1 R320.1 R327.1 U13.1 U13.2 U13.3 U13.5 U13.6 U13.7 U13.12 U13.13 U13.14 U26.1 U26.2 U26.3

## Text inside footprints (layer, text, board x,y; h text height)
C100: Top Overlay "+" at 7314,2499 h39.37 r90
C121: Top Overlay "+" at 8619,1189 h39.37 r90
C123: Top Overlay "+" at 8944,1189 h39.37 r90
C124: Top Overlay "+" at 7964,1189 h39.37 r90
C126: Top Overlay "+" at 8294,1189 h39.37 r90
C127: Top Overlay "+" at 7314,1189 h39.37 r90
C129: Top Overlay "+" at 7639,1189 h39.37 r90
"Header  2 * 8": Top Overlay "2" at 11215,3655 h50 r90; Top Overlay "1" at 11315,3655 h50 r90; Top Overlay "15" at 11315,4515 h50 r90; Top Overlay "16" at 11215,4515 h50 r90
Q2: Top Overlay "S" at 10495.35,1000.12 h40 r180; Top Overlay "D" at 10602.64,1000.12 h40 r180; Top Overlay "G" at 10710.91,1010.94 h40 r180
Q3: Top Overlay "S" at 11460.35,1345.12 h40 r180; Top Overlay "D" at 11567.64,1345.12 h40 r180; Top Overlay "G" at 11675.91,1355.94 h40 r180
Q4: Top Overlay "S" at 10505.21,645.94 h40 r180; Top Overlay "D" at 10612.49,645.94 h40 r180; Top Overlay "G" at 10720.76,656.77 h40 r180
Q5: Top Overlay "S" at 11555.35,975.12 h40 r180; Top Overlay "D" at 11662.64,975.12 h40 r180; Top Overlay "G" at 11770.91,985.94 h40 r180
Q6: Top Overlay "S" at 10975.35,995.12 h40 r180; Top Overlay "D" at 11082.64,995.12 h40 r180; Top Overlay "G" at 11190.91,1005.94 h40 r180
Q7: Top Overlay "S" at 11630.35,590.12 h40 r180; Top Overlay "D" at 11737.64,590.12 h40 r180; Top Overlay "G" at 11845.91,600.94 h40 r180
Q8: Top Overlay "S" at 11035.35,630.12 h40 r180; Top Overlay "D" at 11142.64,630.12 h40 r180; Top Overlay "G" at 11250.91,640.94 h40 r180
Q9: Top Overlay "S" at 12055.35,1375.12 h40 r180; Top Overlay "D" at 12162.64,1375.12 h40 r180; Top Overlay "G" at 12270.91,1385.94 h40 r180